# EAGLE board Touch_Shield-Panel-v12a (EAGLE 6.5.0)
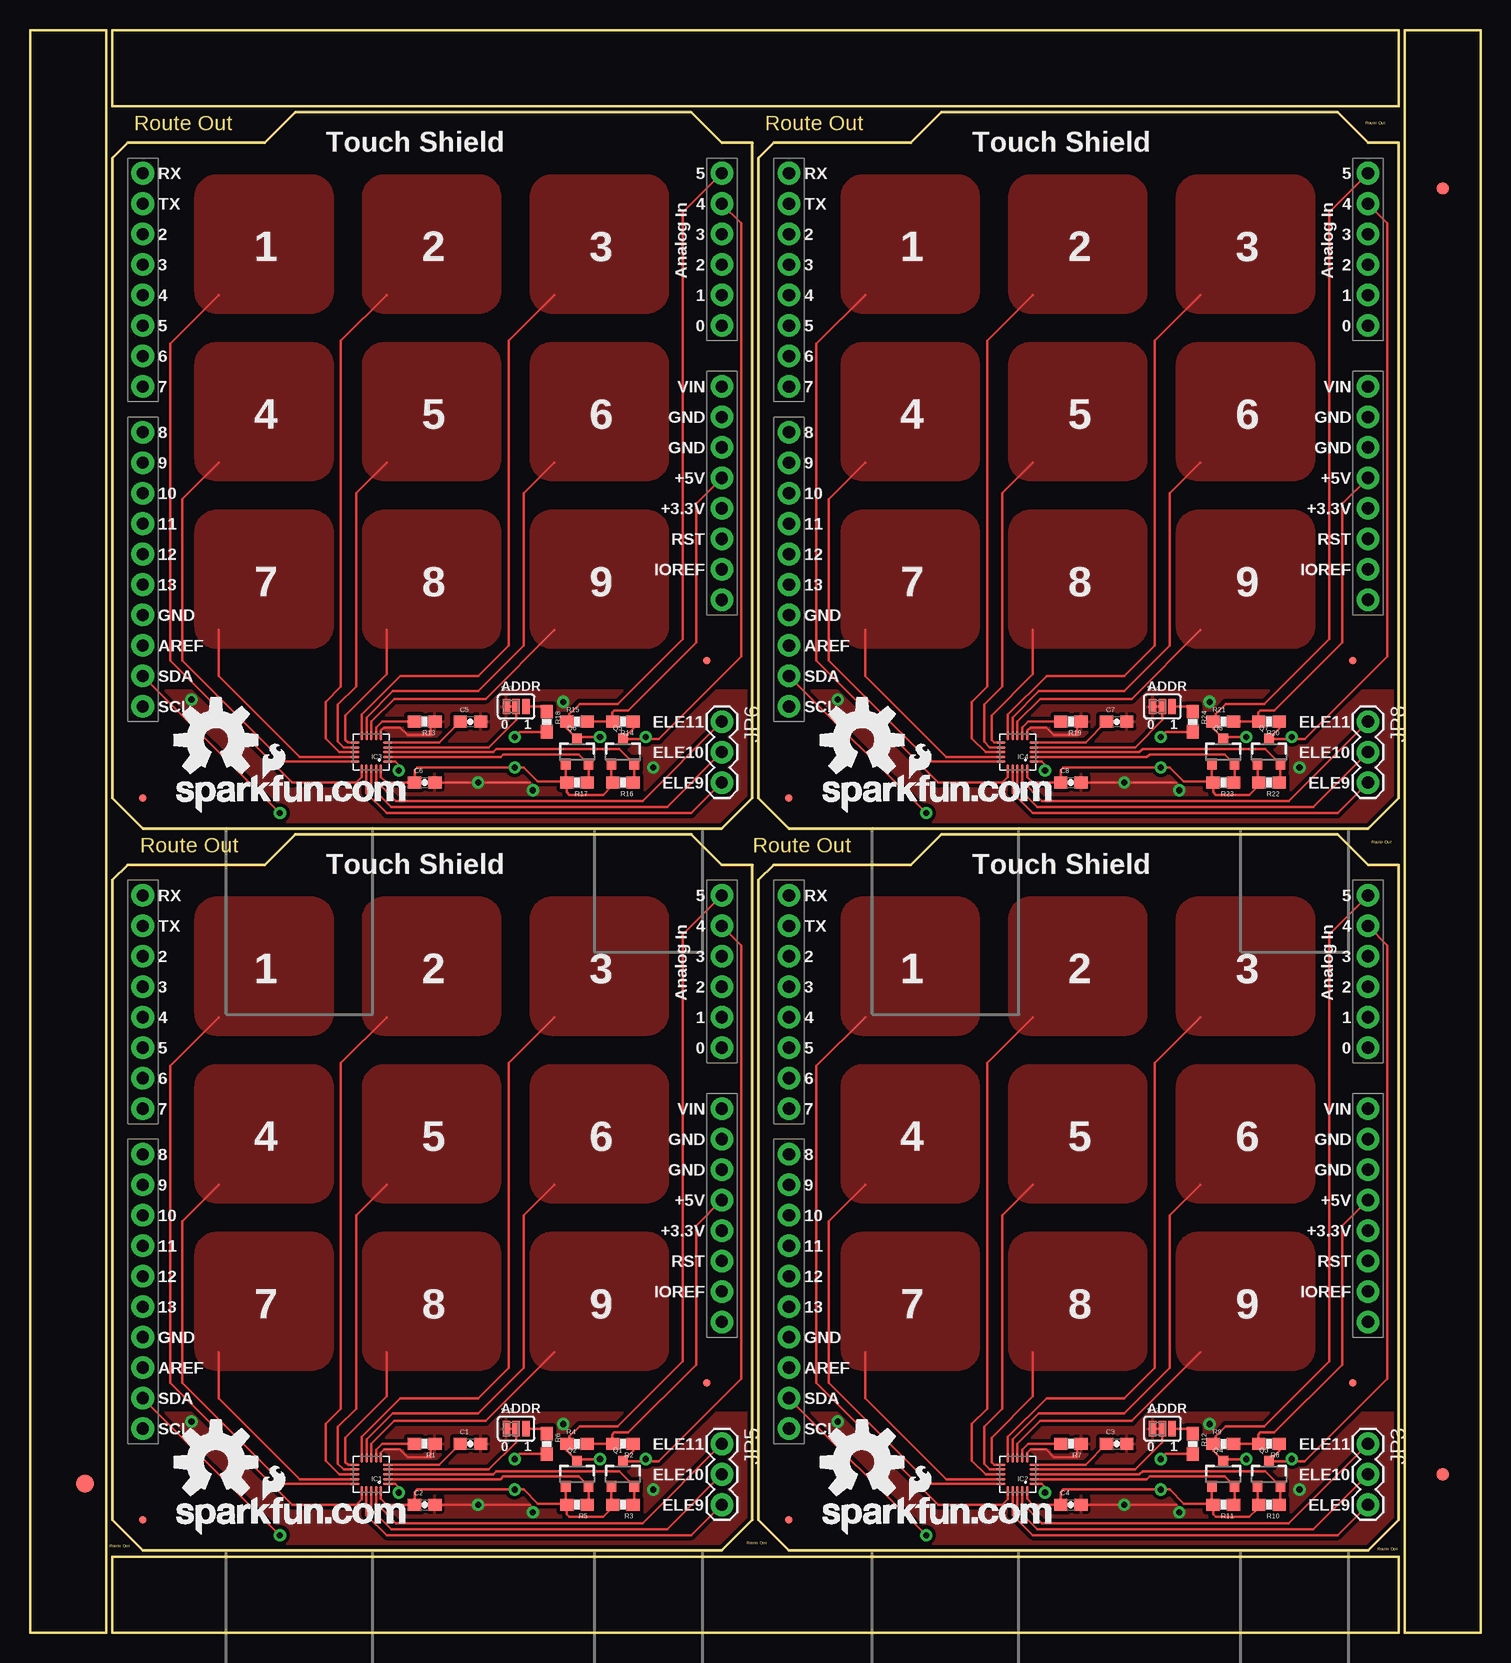
[diagram p0: board, top side]
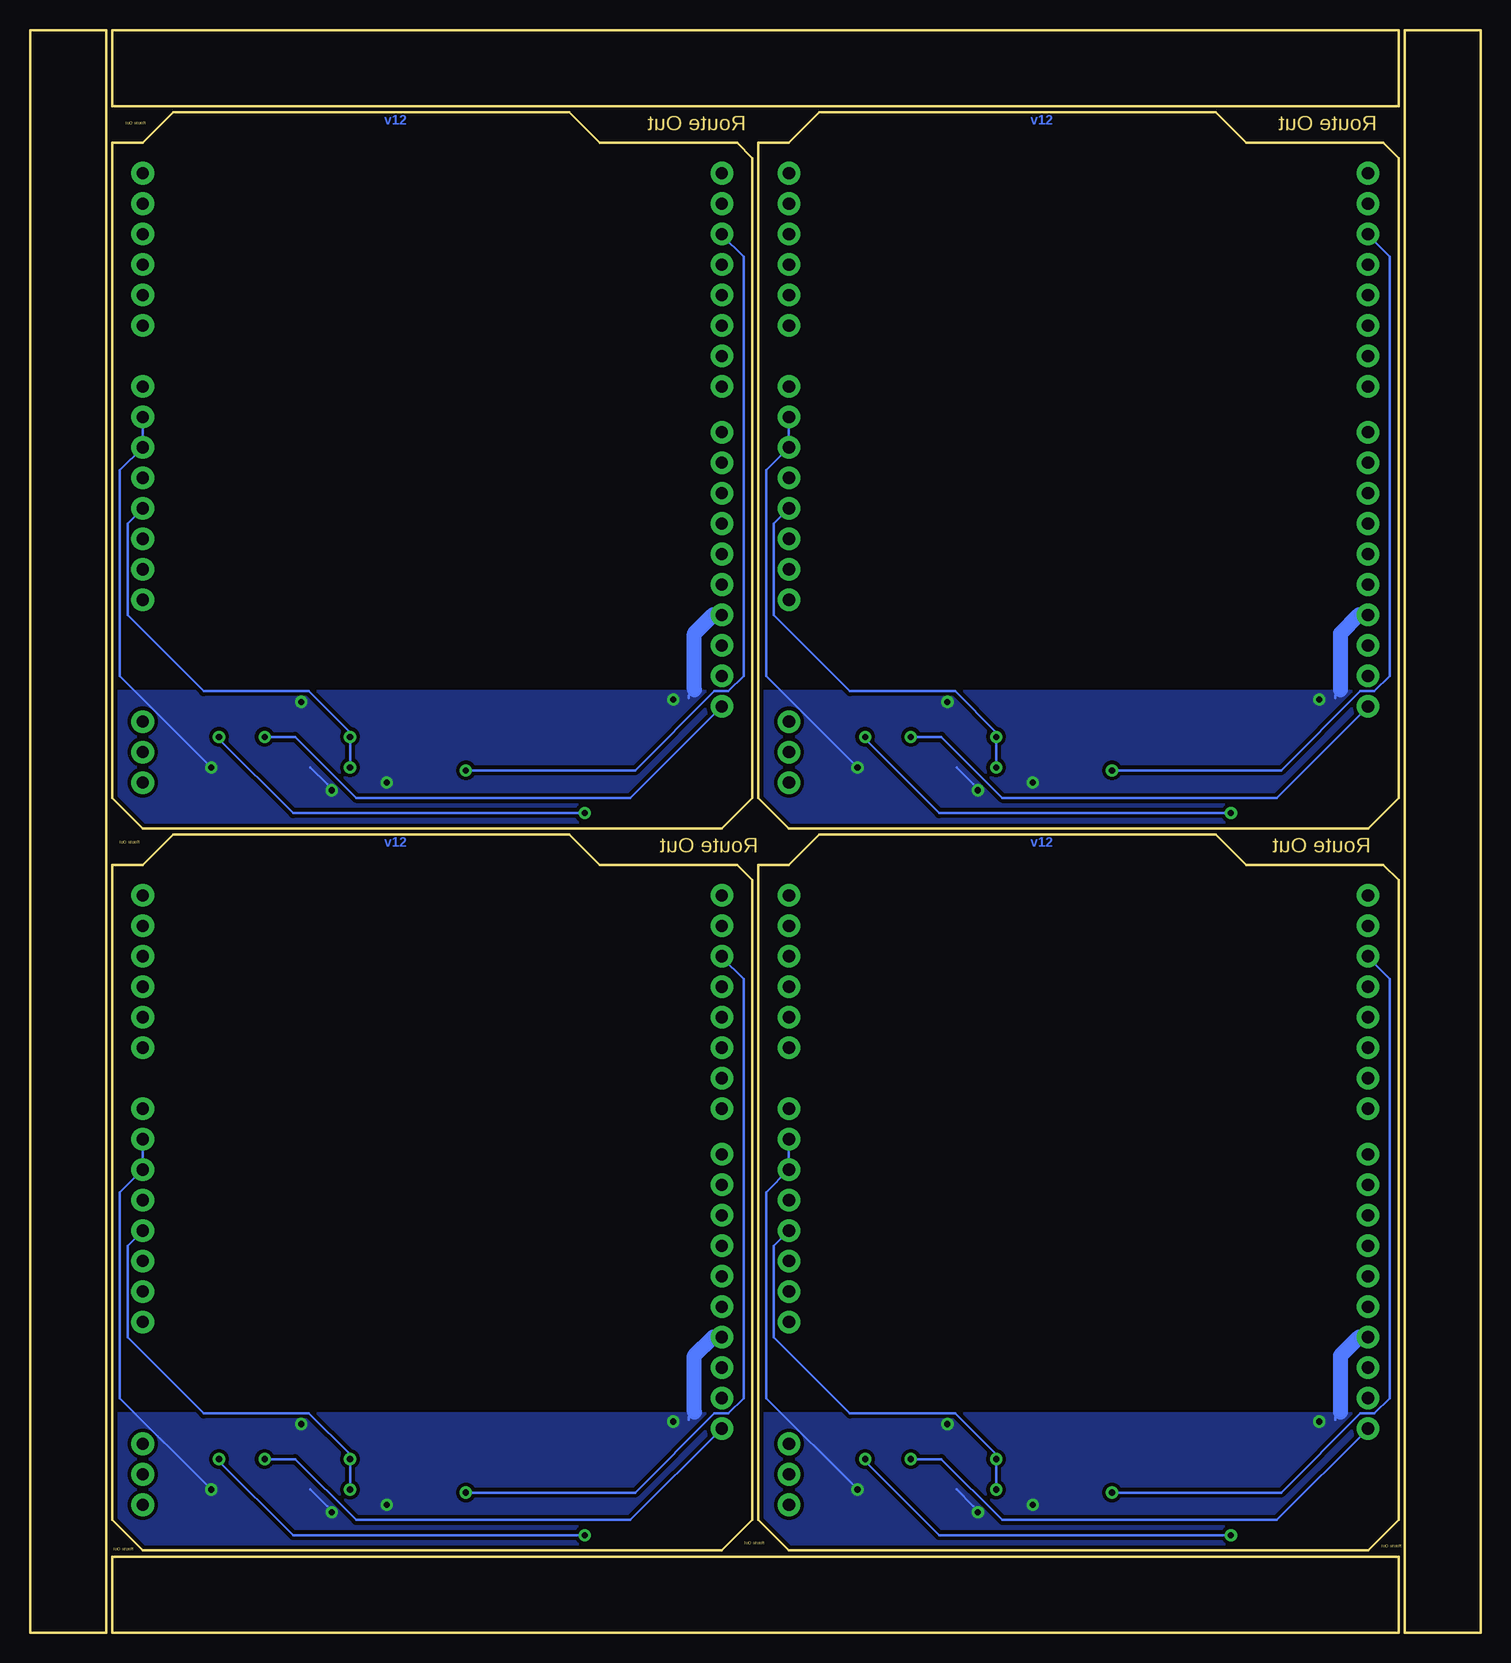
[diagram p1: board, bottom side, seen from below]

Size 120.9 x 133.6 mm. Coordinates in mm from the lower left corner, seen from the top.
Outline: 94.49,127.25 6.86,127.25 6.86,133.6 44.96,133.6
Outline: 36.58,133.6 114.05,133.6 114.05,127.25 86.11,127.25
Outline: 57.66,6.86 9.4,6.86 6.86,9.4 6.86,62.74 8.13,64.01 19.56,64.01 22.1,66.55 55.12,66.55 57.66,64.01 60.2,64.01 60.2,9.4 57.66,6.86
Outline: 111.51,6.86 63.25,6.86 60.71,9.4 60.71,62.74 61.98,64.01 73.41,64.01 75.95,66.55 108.97,66.55 111.51,64.01 114.05,64.01 114.05,9.4 111.51,6.86
Outline: 57.66,67.06 9.4,67.06 6.86,69.6 6.86,122.94 8.13,124.21 19.56,124.21 22.1,126.75 55.12,126.75 57.66,124.21 60.2,124.21 60.2,69.6 57.66,67.06
Outline: 111.51,67.06 63.25,67.06 60.71,69.6 60.71,122.94 61.98,124.21 73.41,124.21 75.95,126.75 108.97,126.75 111.51,124.21 114.05,124.21 114.05,69.6 111.51,67.06
Outline: 6.35,0 6.35,133.6 0,133.6 0,0 6.35,0
Outline: 6.86,0 114.05,0 114.05,6.35 6.86,6.35 6.86,0
Outline: 120.9,0 120.9,133.6 114.55,133.6 114.55,0 120.9,0
Copper layers (1*16): Top 0.035mm / dielectric 1.5mm / Bottom 0.035mm
Design rules "SparkFun *": minimum track width 8mil, minimum drill 20mil, track to track 8mil, track to pad 8mil, pad to pad 8mil, via to via 8mil, smd to smd 8mil, copper to edge 8mil, drill to drill 8mil, minimum pad ring 12mil, minimum via ring 10mil, stop-mask expansion 4mil, vias tented up to drill 20mil, thermal gap 10mil
tRestrict: area 29.5,14.5 to 29.6,14.6; area 83.4,14.5 to 83.4,14.6; area 29.5,74.7 to 29.6,74.8; area 83.4,74.7 to 83.4,74.8

## Footprints (pad centres in the part's own frame; a part is rotated, then mirrored left to right if it is on the bottom)
0603-CAP = smd 1.1 x 1: 1 -0.85,0; 2 0.85,0
FIDUCIAL-1.5X3 = smd 1.5 x 1.5: 1 0,0
FIDUCIAL-1X2 = smd 1 x 1: 1 0,0
MICRO-FIDUCIAL = smd 0.635 x 0.635: 1 0,0
QFN-20-0.4MM-V2 = smd 0.75 x 0.195: 1 -1.367,0.8; 2 -1.367,0.4; 3 -1.367,0; 4 -1.367,-0.4; 5 -1.367,-0.8; 11 1.375,-0.8; 12 1.375,-0.4; 13 1.375,0; 14 1.375,0.4; 15 1.375,0.8 | smd 0.195 x 0.75: 6 -0.795,-1.372; 7 -0.395,-1.372; 8 0.005,-1.372; 9 0.405,-1.372; 10 0.805,-1.372; 16 0.81,1.372; 17 0.41,1.372; 18 0.01,1.372; 19 -0.39,1.372; 20 -0.79,1.372
1X03 = drill 1.016 pad 1.88: 1 0,0; 2 2.54,0; 3 5.08,0
SOT23-3 = smd 0.8 x 0.9: 1 -0.95,-1; 2 0.95,-1; 3 0,1.1
0603-RES = smd 1.1 x 1: 1 -0.85,0; 2 0.85,0
SJ_3_PASTE1&2 = smd 0.635 x 1.27: 1 -0.813,0; 2 0,0; 3 0.813,0
UNO_R3_SHIELD = drill 1.016 pad 1.88: 3.3V 50.8,26.67; 5V 50.8,29.21; A0 50.8,41.91; A1 50.8,44.45; A2 50.8,46.99; A3 50.8,49.53; A4 50.8,52.07; A5 50.8,54.61; AREF 2.54,15.24; D2 2.54,49.53; D3 2.54,46.99; D4 2.54,44.45; D5 2.54,41.91; D6 2.54,39.37; D7 2.54,36.83; D8 2.54,33.02; D9 2.54,30.48; D10 2.54,27.94; D11 2.54,25.4; D12 2.54,22.86; D13 2.54,20.32; GND@0 50.8,31.75; GND@1 50.8,34.29; GND@2 2.54,17.78; IOREF 50.8,21.59; NC 50.8,19.05; RES 50.8,24.13; RX 2.54,54.61; SCL 2.54,10.16; SDA 2.54,12.7; TX 2.54,52.07; VIN 50.8,36.83

## Placement (x,y rotation side)
C1  0.1uF  [0603-CAP]  36.7,15.75 0 top
C2  0.1uF  [0603-CAP]  32.89,10.67 0 top
C3  0.1uF  [0603-CAP]  90.55,15.75 0 top
C4  0.1uF  [0603-CAP]  86.74,10.67 0 top
C5  0.1uF  [0603-CAP]  36.7,75.95 0 top
C6  0.1uF  [0603-CAP]  32.89,70.87 0 top
C7  0.1uF  [0603-CAP]  90.55,75.95 0 top
C8  0.1uF  [0603-CAP]  86.74,70.87 0 top
E$1  [FIDUCIAL-1.5X3]  4.57,12.45 0 top
E$4  [FIDUCIAL-1X2]  117.73,13.21 0 top
E$8  [FIDUCIAL-1X2]  117.73,120.4 180 top
FID1  FIDUCIALUFIDUCIAL  [MICRO-FIDUCIAL]  9.4,9.4 0 top
FID2  FIDUCIALUFIDUCIAL  [MICRO-FIDUCIAL]  56.39,20.83 0 top
FID3  FIDUCIALUFIDUCIAL  [MICRO-FIDUCIAL]  63.25,9.4 0 top
FID4  FIDUCIALUFIDUCIAL  [MICRO-FIDUCIAL]  110.24,20.83 0 top
FID5  FIDUCIALUFIDUCIAL  [MICRO-FIDUCIAL]  9.4,69.6 0 top
FID6  FIDUCIALUFIDUCIAL  [MICRO-FIDUCIAL]  56.39,81.03 0 top
FID7  FIDUCIALUFIDUCIAL  [MICRO-FIDUCIAL]  63.25,69.6 0 top
FID8  FIDUCIALUFIDUCIAL  [MICRO-FIDUCIAL]  110.24,81.03 0 top
IC1  MPR121  [QFN-20-0.4MM-V2]  28.45,13.21 180 top
IC2  MPR121  [QFN-20-0.4MM-V2]  82.3,13.21 180 top
IC3  MPR121  [QFN-20-0.4MM-V2]  28.45,73.41 180 top
IC4  MPR121  [QFN-20-0.4MM-V2]  82.3,73.41 180 top
JP1  LOGO-SFENEW  [SFE-NEW-WEBLOGO]  12.19,8.18 0 top
JP2  LOGO-SFENEW  [SFE-NEW-WEBLOGO]  66.04,8.18 0 top
JP3  extra  [1X03]  111.51,15.75 270 top
JP4  LOGO-SFENEW  [SFE-NEW-WEBLOGO]  12.19,68.38 0 top
JP5  extra  [1X03]  57.66,15.75 270 top
JP6  extra  [1X03]  57.66,75.95 270 top
JP7  LOGO-SFENEW  [SFE-NEW-WEBLOGO]  66.04,68.38 0 top
JP8  extra  [1X03]  111.51,75.95 270 top
Q1  BSS138  [SOT23-3]  49.4,13.21 0 top
Q2  BSS138  [SOT23-3]  45.59,13.21 0 top
Q3  BSS138  [SOT23-3]  103.25,13.21 0 top
Q4  BSS138  [SOT23-3]  99.44,13.21 0 top
Q5  BSS138  [SOT23-3]  49.4,73.41 0 top
Q6  BSS138  [SOT23-3]  45.59,73.41 0 top
Q7  BSS138  [SOT23-3]  103.25,73.41 0 top
Q8  BSS138  [SOT23-3]  99.44,73.41 0 top
R1  75k  [0603-RES]  32.89,15.75 180 top
R2  10k  [0603-RES]  49.4,15.75 180 top
R3  10k  [0603-RES]  49.4,10.67 180 top
R4  10k  [0603-RES]  45.59,15.75 0 top
R5  10k  [0603-RES]  45.59,10.67 180 top
R6  10K  [0603-RES]  43.05,15.75 270 top
R7  75k  [0603-RES]  86.74,15.75 180 top
R8  10k  [0603-RES]  103.25,15.75 180 top
R9  10k  [0603-RES]  99.44,15.75 0 top
R10  10k  [0603-RES]  103.25,10.67 180 top
R11  10k  [0603-RES]  99.44,10.67 180 top
R12  10K  [0603-RES]  96.9,15.75 270 top
R13  75k  [0603-RES]  32.89,75.95 180 top
R14  10k  [0603-RES]  49.4,75.95 180 top
R15  10k  [0603-RES]  45.59,75.95 0 top
R16  10k  [0603-RES]  49.4,70.87 180 top
R17  10k  [0603-RES]  45.59,70.87 180 top
R18  10K  [0603-RES]  43.05,75.95 270 top
R19  75k  [0603-RES]  86.74,75.95 180 top
R20  10k  [0603-RES]  103.25,75.95 180 top
R21  10k  [0603-RES]  99.44,75.95 0 top
R22  10k  [0603-RES]  103.25,70.87 180 top
R23  10k  [0603-RES]  99.44,70.87 180 top
R24  10K  [0603-RES]  96.9,75.95 270 top
SJ1  [SJ_3_PASTE1&2]  40.51,17.02 0 top
SJ2  [SJ_3_PASTE1&2]  94.36,17.02 0 top
SJ3  [SJ_3_PASTE1&2]  40.51,77.22 0 top
SJ4  [SJ_3_PASTE1&2]  94.36,77.22 0 top
U1  ARDUINO_R3_SHIELD  [UNO_R3_SHIELD]  6.86,6.86 0 top
U2  ARDUINO_R3_SHIELD  [UNO_R3_SHIELD]  60.71,6.86 0 top
U3  ARDUINO_R3_SHIELD  [UNO_R3_SHIELD]  6.86,67.06 0 top
U4  ARDUINO_R3_SHIELD  [UNO_R3_SHIELD]  60.71,67.06 0 top
U$1  OSHW-LOGOL  [OSHW-LOGO-L]  69.34,14.22 0 top
U$2  OSHW-LOGOL  [OSHW-LOGO-L]  15.49,74.42 0 top
U$3  OSHW-LOGOL  [OSHW-LOGO-L]  69.34,74.42 0 top
U$5  OSHW-LOGOL  [OSHW-LOGO-L]  15.49,14.22 0 top

## Library data of the parts
C1-C8 JP1-JP8 Q1-Q8 R1 R7 R13 R19 = SparkFun
E$1 E$4 E$8 FID1-FID8 U$1-U$3 U$5 = SparkFun-Aesthetics
IC1-IC4 = SparkFun-Sensors
R2-R6 R8-R12 R14-R18 R20-R24 = SparkFun-Resistors; PROD_ID: RES-00824
SJ1-SJ4 = SparkFun-Passives
U1-U4 = SparkFun-Boards

## Nets
3.3V: C2.1 IC1.20 Q1.1 Q2.1 R3.2 R5.2 R6.2 U1.3.3V
3.3V1: C4.1 IC2.20 Q3.1 Q4.1 R10.2 R11.2 R12.2 U2.3.3V
3.3V2: C6.1 IC3.20 Q5.1 Q6.1 R16.2 R17.2 R18.2 U3.3.3V
3.3V3: C8.1 IC4.20 Q7.1 Q8.1 R22.2 R23.2 R24.2 U4.3.3V
5V: R2.2 R4.2 U1.5V
5V1: R8.2 R9.2 U2.5V
5V2: R14.2 R15.2 U3.5V
5V3: R20.2 R21.2 U4.5V
*IRQ: IC1.1 U1.D2
*IRQ1: IC2.1 U2.D2
*IRQ2: IC3.1 U3.D2
*IRQ3: IC4.1 U4.D2
A0: U1.A0
A1: U1.A1
A2: U1.A2
A3: U1.A3
A4: U2.A0
A5: U2.A1
A6: U2.A2
A7: U2.A3
A8: U3.A0
A9: U3.A1
A10: U3.A2
A11: U3.A3
A12: U4.A0
A13: U4.A1
A14: U4.A2
A15: U4.A3
AREF: U1.AREF
AREF1: U2.AREF
AREF2: U3.AREF
AREF3: U4.AREF
D1: U2.D3
D2: U2.D4
D3: U1.D3
D4: U1.D4
D5: U1.D5
D6: U1.D6
D7: U1.D7
D8: U1.D8
D9: U1.D9
D10: U1.D10
D11: U1.D11
D12: U1.D12
D13: U1.D13
D14: U2.D5
D15: U2.D6
D16: U2.D7
D17: U2.D8
D18: U2.D9
D19: U2.D10
D20: U2.D11
D21: U2.D12
D22: U2.D13
D23: U3.D3
D24: U3.D4
D25: U3.D5
D26: U3.D6
D27: U3.D7
D28: U3.D8
D29: U3.D9
D30: U3.D10
D31: U3.D11
D32: U3.D12
D33: U3.D13
D34: U4.D3
D35: U4.D4
D36: U4.D5
D37: U4.D6
D38: U4.D7
D39: U4.D8
D40: U4.D9
D41: U4.D10
D42: U4.D11
D43: U4.D12
D44: U4.D13
ELE1: IC2.19 JP3.1
ELE2: IC2.18 JP3.2
ELE3: IC2.17 JP3.3
ELE4: IC3.19 JP6.1
ELE5: IC3.18 JP6.2
ELE6: IC3.17 JP6.3
ELE7: IC4.19 JP8.1
ELE8: IC4.18 JP8.2
ELE9: IC1.17 JP5.3
ELE10: IC1.18 JP5.2
ELE11: IC1.19 JP5.1
ELE12: IC4.17 JP8.3
GND: C1.2 C2.2 IC1.6 R1.1 SJ1.1 U1.GND@0 U1.GND@1 U1.GND@2
GND1: C3.2 C4.2 IC2.6 R7.1 SJ2.1 U2.GND@0 U2.GND@1 U2.GND@2
GND2: C5.2 C6.2 IC3.6 R13.1 SJ3.1 U3.GND@0 U3.GND@1 U3.GND@2
GND3: C7.2 C8.2 IC4.6 R19.1 SJ4.1 U4.GND@0 U4.GND@1 U4.GND@2
IOREF: U1.IOREF
IOREF1: U2.IOREF
IOREF2: U3.IOREF
IOREF3: U4.IOREF
N$1: IC1.4 SJ1.2
N$2: R6.1 SJ1.3
N$3: IC2.4 SJ2.2
N$4: R12.1 SJ2.3
N$5: IC3.4 SJ3.2
N$6: R18.1 SJ3.3
N$7: IC4.4 SJ4.2
N$8: R24.1 SJ4.3
PAD1: IC1.16
PAD2: IC1.13
PAD3: IC1.10
PAD4: IC1.15
PAD5: IC1.12
PAD6: IC1.9
PAD7: IC1.14
PAD8: IC1.11
PAD9: IC1.8
PAD10: IC2.16
PAD11: IC2.15
PAD12: IC2.11
PAD13: IC2.14
PAD14: IC2.13
PAD15: IC2.12
PAD16: IC2.8
PAD17: IC2.9
PAD18: IC2.10
PAD19: IC3.16
PAD20: IC3.15
PAD21: IC3.11
PAD22: IC3.14
PAD23: IC3.13
PAD24: IC3.12
PAD25: IC3.8
PAD26: IC3.9
PAD27: IC3.10
PAD28: IC4.16
PAD29: IC4.15
PAD30: IC4.11
PAD31: IC4.14
PAD32: IC4.13
PAD33: IC4.12
PAD34: IC4.8
PAD35: IC4.9
PAD36: IC4.10
RESET: U1.RES
RESET1: U2.RES
RESET2: U3.RES
RESET3: U4.RES
REXT: IC1.7 R1.2
REXT1: IC2.7 R7.2
REXT2: IC3.7 R13.2
REXT3: IC4.7 R19.2
RX: U1.RX
RX1: U2.RX
RX2: U3.RX
RX3: U4.RX
SCL_H: Q2.3 R4.1 U1.A5 U1.SCL
SCL_H1: Q4.3 R9.1 U2.A5 U2.SCL
SCL_H2: Q6.3 R15.1 U3.A5 U3.SCL
SCL_H3: Q8.3 R21.1 U4.A5 U4.SCL
SCL_L: IC1.2 Q2.2 R5.1
SCL_L1: IC2.2 Q4.2 R11.1
SCL_L2: IC3.2 Q6.2 R17.1
SCL_L3: IC4.2 Q8.2 R23.1
SDA_H: Q1.3 R2.1 U1.A4 U1.SDA
SDA_H1: Q3.3 R8.1 U2.A4 U2.SDA
SDA_H2: Q5.3 R14.1 U3.A4 U3.SDA
SDA_H3: Q7.3 R20.1 U4.A4 U4.SDA
SDA_L: IC1.3 Q1.2 R3.1
SDA_L1: IC2.3 Q3.2 R10.1
SDA_L2: IC3.3 Q5.2 R16.1
SDA_L3: IC4.3 Q7.2 R22.1
TX: U1.TX
TX1: U2.TX
TX2: U3.TX
TX3: U4.TX
VIN: U1.VIN
VIN1: U2.VIN
VIN2: U3.VIN
VIN3: U4.VIN
VREG: C1.1 IC1.5
VREG1: C3.1 IC2.5
VREG2: C5.1 IC3.5
VREG3: C7.1 IC4.5

## Tracks (layer width: path | path; a pad name or v marks a point on that pad's centre or on a via)
3.3V  (via drill 0.51)
  Top 0.203: 44.96,10.67 R5.2 | Q2.1 44.64,10.77 | 44.64,10.77 R5.2 | Q1.1 48.45,10.77 | 48.45,10.77 R3.2 | IC1.20 29.24,11.15 29.72,10.67 C2.1 32.04,11.72 32.26,11.94 v40.39,11.94 41.15,11.94 42.32,10.77 44.64,10.77 | R6.2 40.81,14.9 v40.39,14.48 | 48.45,10.77 48.45,10.35 47.75,9.65 44.96,9.65 44.74,9.87 R5.2
  Bottom 0.203: U1.3.3V 58.93,32.26 58.93,24.64 52.58,18.29 43.81,18.29 40.39,14.86 v40.39,14.48 v40.39,11.94
3.3V1  (via drill 0.51)
  Top 0.203: 98.81,10.67 R11.2 | Q4.1 98.49,10.77 | 98.49,10.77 R11.2 | Q3.1 102.3,10.77 | 102.3,10.77 R10.2 | IC2.20 83.09,11.15 83.57,10.67 C4.1 85.89,11.72 86.11,11.94 v94.23,11.94 95,11.94 96.17,10.77 98.49,10.77 | R12.2 94.65,14.9 v94.23,14.48 | 102.3,10.77 102.3,10.35 101.6,9.65 98.81,9.65 98.59,9.87 R11.2
  Bottom 0.203: U2.3.3V 112.78,32.26 112.78,24.64 106.43,18.29 97.66,18.29 94.23,14.86 v94.23,14.48 v94.23,11.94
3.3V2  (via drill 0.51)
  Top 0.203: 44.96,70.87 R17.2 | Q6.1 44.64,70.97 | 44.64,70.97 R17.2 | Q5.1 48.45,70.97 | 48.45,70.97 R16.2 | IC3.20 29.24,71.35 29.72,70.87 C6.1 32.04,71.92 32.26,72.14 v40.39,72.14 41.15,72.14 42.32,70.97 44.64,70.97 | R18.2 40.81,75.1 v40.39,74.68 | 48.45,70.97 48.45,70.55 47.75,69.85 44.96,69.85 44.74,70.06 R17.2
  Bottom 0.203: U3.3.3V 58.93,92.46 58.93,84.84 52.58,78.49 43.81,78.49 40.39,75.06 v40.39,74.68 v40.39,72.14
3.3V3  (via drill 0.51)
  Top 0.203: 98.81,70.87 R23.2 | Q8.1 98.49,70.97 | 98.49,70.97 R23.2 | Q7.1 102.3,70.97 | 102.3,70.97 R22.2 | IC4.20 83.09,71.35 83.57,70.87 C8.1 85.89,71.92 86.11,72.14 v94.23,72.14 95,72.14 96.17,70.97 98.49,70.97 | R24.2 94.65,75.1 v94.23,74.68 | 102.3,70.97 102.3,70.55 101.6,69.85 98.81,69.85 98.59,70.06 R23.2
  Bottom 0.203: U4.3.3V 112.78,92.46 112.78,84.84 106.43,78.49 97.66,78.49 94.23,75.06 v94.23,74.68 v94.23,72.14
5V
  Top 0.203: R4.2 R2.2 48.51,15.79 48.51,16.51 48.69,16.69 49.86,16.69 55.52,22.35 55.52,33.93 U1.5V
5V1
  Top 0.203: R9.2 R8.2 102.36,15.79 102.36,16.51 102.54,16.69 103.71,16.69 109.37,22.35 109.37,33.93 U2.5V
5V2
  Top 0.203: R15.2 R14.2 48.51,75.98 48.51,76.71 48.69,76.89 49.86,76.89 55.52,82.55 55.52,94.13 U3.5V
5V3
  Top 0.203: R21.2 R20.2 102.36,75.98 102.36,76.71 102.54,76.89 103.71,76.89 109.37,82.55 109.37,94.13 U4.5V
*IRQ  (via drill 0.51)
  Top 0.203: IC1.1 30.45,12.41 30.82,12.04 30.82,11.77 v30.73,11.68
  Bottom 0.203: U1.D2 9.4,56.31 7.59,54.51 7.59,19.56 8.87,18.29 10.03,18.29 16.64,11.68 v30.73,11.68
*IRQ1  (via drill 0.51)
  Top 0.203: IC2.1 84.3,12.41 84.67,12.04 84.67,11.77 v84.58,11.68
  Bottom 0.203: U2.D2 63.25,56.31 61.44,54.51 61.44,19.56 62.71,18.29 63.88,18.29 70.48,11.68 v84.58,11.68
*IRQ2  (via drill 0.51)
  Top 0.203: IC3.1 30.45,72.61 30.82,72.24 30.82,71.97 v30.73,71.88
  Bottom 0.203: U3.D2 9.4,116.51 7.59,114.71 7.59,79.76 8.87,78.49 10.03,78.49 16.64,71.88 v30.73,71.88
*IRQ3  (via drill 0.51)
  Top 0.203: IC4.1 84.3,72.61 84.67,72.24 84.67,71.97 v84.58,71.88
  Bottom 0.203: U4.D2 63.25,116.51 61.44,114.71 61.44,79.76 62.71,78.49 63.88,78.49 70.48,71.88 v84.58,71.88
ELE1
  Top 0.203: JP3.1 104.9,9.14 84.33,9.14 82.69,10.79 IC2.19
ELE2
  Top 0.203: JP3.2 106.93,8.64 83.95,8.64 82.29,10.3 IC2.18
ELE3
  Top 0.203: JP3.3 108.97,8.13 83.57,8.13 81.89,9.81 IC2.17
ELE4
  Top 0.203: JP6.1 51.05,69.34 30.48,69.34 28.84,70.98 IC3.19
ELE5
  Top 0.203: JP6.2 53.09,68.83 30.1,68.83 28.44,70.5 IC3.18
ELE6
  Top 0.203: JP6.3 55.12,68.33 29.72,68.33 28.04,70.01 IC3.17
ELE7
  Top 0.203: JP8.1 104.9,69.34 84.33,69.34 82.69,70.98 IC4.19
ELE8
  Top 0.203: JP8.2 106.93,68.83 83.95,68.83 82.29,70.5 IC4.18
ELE9
  Top 0.203: JP5.3 55.12,8.13 29.72,8.13 28.04,9.81 IC1.17
ELE10
  Top 0.203: JP5.2 53.09,8.64 30.1,8.64 28.44,10.3 IC1.18
ELE11
  Top 0.203: JP5.1 51.05,9.14 30.48,9.14 28.84,10.79 IC1.19
ELE12
  Top 0.203: JP8.3 108.97,68.33 83.57,68.33 81.89,70.01 IC4.17
GND  (via drill 0.51)
  Top 0.203: IC1.6 29.24,14.99 29.53,15.28 30.82,15.28 31.47,14.63 33.41,14.63 33.41,15.42 R1.1 | C2.2 41.66,10.67 | SJ1.1 40.51,17.02
  Bottom 0.203: 12.15,17.73 12.15,17.95 11.68,18.41 | 42.29,10.54 43.69,11.94 | U1.GND@1 U1.GND@0 59.56,36.7 59.56,19.56 v51.94,11.94
  Bottom 1.27: U1.GND@2 10.16,24.64 11.68,23.11 11.68,18.41
  other vias: 13.46,17.6 37.34,10.67 44.45,17.4 41.91,10.03
  pour Bottom (isolate 0.305): 6.86,6.86 60.2,6.86 60.2,18.29 6.86,18.29
  pour Top (isolate 0.305): 6.86,18.29 6.86,6.86 60.2,6.86 60.2,18.29
GND1  (via drill 0.51)
  Top 0.203: IC2.6 83.09,14.99 83.38,15.28 84.67,15.28 85.32,14.63 87.26,14.63 87.26,15.42 R7.1 | C4.2 95.5,10.67 | SJ2.1 94.36,17.02
  Bottom 0.203: 66,17.73 66,17.95 65.53,18.41 | 96.14,10.54 97.54,11.94 | U2.GND@1 U2.GND@0 113.41,36.7 113.41,19.56 v105.79,11.94
  Bottom 1.27: U2.GND@2 64.01,24.64 65.53,23.11 65.53,18.41
  other vias: 67.31,17.6 91.19,10.67 98.3,17.4 95.76,10.03
  pour Bottom (isolate 0.305): 60.71,6.86 114.05,6.86 114.05,18.29 60.71,18.29
  pour Top (isolate 0.305): 60.71,18.29 60.71,6.86 114.05,6.86 114.05,18.29
GND2  (via drill 0.51)
  Top 0.203: IC3.6 29.24,75.19 29.53,75.48 30.82,75.48 31.47,74.83 33.41,74.83 33.41,75.62 R13.1 | C6.2 41.66,70.87 | SJ3.1 40.51,77.22
  Bottom 0.203: 12.15,77.93 12.15,78.14 11.68,78.61 | 42.29,70.74 43.69,72.14 | U3.GND@1 U3.GND@0 59.56,96.9 59.56,79.76 v51.94,72.14
  Bottom 1.27: U3.GND@2 10.16,84.84 11.68,83.31 11.68,78.61
  other vias: 13.46,77.8 37.34,70.87 44.45,77.6 41.91,70.23
  pour Bottom (isolate 0.305): 6.86,67.06 60.2,67.06 60.2,78.49 6.86,78.49
  pour Top (isolate 0.305): 6.86,78.49 6.86,67.06 60.2,67.06 60.2,78.49
GND3  (via drill 0.51)
  Top 0.203: IC4.6 83.09,75.19 83.38,75.48 84.67,75.48 85.32,74.83 87.26,74.83 87.26,75.62 R19.1 | C8.2 95.5,70.87 | SJ4.1 94.36,77.22
  Bottom 0.203: 66,77.93 66,78.14 65.53,78.61 | 96.14,70.74 97.54,72.14 | U4.GND@1 U4.GND@0 113.41,96.9 113.41,79.76 v105.79,72.14
  Bottom 1.27: U4.GND@2 64.01,84.84 65.53,83.31 65.53,78.61
  other vias: 67.31,77.8 91.19,70.87 98.3,77.6 95.76,70.23
  pour Bottom (isolate 0.305): 60.71,67.06 114.05,67.06 114.05,78.49 60.71,78.49
  pour Top (isolate 0.305): 60.71,78.49 60.71,67.06 114.05,67.06 114.05,78.49
N$1
  Top 0.203: IC1.4 38.25,13.61 40.51,15.88 SJ1.2
N$2
  Top 0.203: SJ1.3 42.63,17.02 R6.1
N$3
  Top 0.203: IC2.4 92.09,13.61 94.36,15.88 SJ2.2
N$4
  Top 0.203: SJ2.3 96.48,17.02 R12.1
N$5
  Top 0.203: IC3.4 38.25,73.81 40.51,76.07 SJ3.2
N$6
  Top 0.203: SJ3.3 42.63,77.22 R18.1
N$7
  Top 0.203: IC4.4 92.09,73.81 94.36,76.07 SJ4.2
N$8
  Top 0.203: SJ4.3 96.48,77.22 R24.1
PAD1
  Top 0.203: 15.75,51.31 11.68,47.24 11.68,20.83 21.84,10.67 27.18,10.67 27.64,11.13 IC1.16
  pour Top (isolate 0.305): 13.79,51.65 arc90 15.59,49.85 23.43,49.85 arc90 25.22,51.65 25.22,59.48 arc90 23.43,61.28 15.59,61.28 arc90 13.79,59.48
PAD2
  Top 0.203: 29.72,51.31 25.91,47.5 25.91,18.67 24.64,17.4 24.64,14.35 25.78,13.21 IC1.13
  pour Top (isolate 0.305): 27.76,51.65 arc90 29.56,49.85 37.4,49.85 arc90 39.19,51.65 39.19,59.48 arc90 37.4,61.28 29.56,61.28 arc90 27.76,59.48
PAD3
  Top 0.203: 43.69,51.31 39.88,47.5 39.88,22.1 37.34,19.56 30.86,19.56 27.64,16.34 IC1.10
  pour Top (isolate 0.305): 41.73,51.65 arc90 43.53,49.85 51.37,49.85 arc90 53.16,51.65 53.16,59.48 arc90 51.37,61.28 43.53,61.28 arc90 41.73,59.48
PAD4
  Top 0.203: 15.75,37.34 12.7,34.29 12.7,20.83 21.12,12.41 IC1.15
  pour Top (isolate 0.305): 13.79,37.68 arc90 15.59,35.88 23.43,35.88 arc90 25.22,37.68 25.22,45.51 arc90 23.43,47.31 15.59,47.31 arc90 13.79,45.51
PAD5
  Top 0.203: 29.72,37.34 27.18,34.8 27.18,18.68 25.65,17.16 25.65,14.1 26.14,13.61 IC1.12
  pour Top (isolate 0.305): 27.76,37.68 arc90 29.56,35.88 37.4,35.88 arc90 39.19,37.68 39.19,45.51 arc90 37.4,47.31 29.56,47.31 arc90 27.76,45.51
PAD6
  Top 0.203: 43.69,37.34 41.15,34.8 41.15,22.1 37.34,18.29 30.23,18.29 28.04,16.11 IC1.9
  pour Top (isolate 0.305): 41.73,37.68 arc90 43.53,35.88 51.37,35.88 arc90 53.16,37.68 53.16,45.51 arc90 51.37,47.31 43.53,47.31 arc90 41.73,45.51
PAD7
  Top 0.203: IC1.14 22.5,12.81 15.75,19.56 15.75,23.37
  pour Top (isolate 0.305): 13.79,23.71 arc90 15.59,21.91 23.43,21.91 arc90 25.22,23.71 25.22,31.54 arc90 23.43,33.34 15.59,33.34 arc90 13.79,31.54
PAD8
  Top 0.203: 29.72,23.37 29.72,19.7 26.29,16.27 26.29,14.22 26.5,14.01 IC1.11
  pour Top (isolate 0.305): 27.76,23.71 arc90 29.56,21.91 37.4,21.91 arc90 39.19,23.71 39.19,31.54 arc90 37.4,33.34 29.56,33.34 arc90 27.76,31.54
PAD9
  Top 0.203: IC1.8 28.44,15.74 30.35,17.65 37.97,17.65 43.69,23.37
  pour Top (isolate 0.305): 41.73,23.71 arc90 43.53,21.91 51.37,21.91 arc90 53.16,23.71 53.16,31.54 arc90 51.37,33.34 43.53,33.34 arc90 41.73,31.54
PAD10
  Top 0.203: 69.6,51.31 65.53,47.24 65.53,20.83 75.69,10.67 81.03,10.67 81.49,11.13 IC2.16
  pour Top (isolate 0.305): 67.64,51.65 arc90 69.44,49.85 77.27,49.85 arc90 79.07,51.65 79.07,59.48 arc90 77.27,61.28 69.44,61.28 arc90 67.64,59.48
PAD11
  Top 0.203: 69.6,37.34 66.55,34.29 66.55,20.83 74.97,12.41 IC2.15
  pour Top (isolate 0.305): 67.64,37.68 arc90 69.44,35.88 77.27,35.88 arc90 79.07,37.68 79.07,45.51 arc90 77.27,47.31 69.44,47.31 arc90 67.64,45.51
PAD12
  Top 0.203: 83.57,23.37 83.57,19.7 80.14,16.27 80.14,14.22 80.35,14.01 IC2.11
  pour Top (isolate 0.305): 81.61,23.71 arc90 83.41,21.91 91.24,21.91 arc90 93.04,23.71 93.04,31.54 arc90 91.24,33.34 83.41,33.34 arc90 81.61,31.54
PAD13
  Top 0.203: IC2.14 76.35,12.81 69.6,19.56 69.6,23.37
  pour Top (isolate 0.305): 67.64,23.71 arc90 69.44,21.91 77.27,21.91 arc90 79.07,23.71 79.07,31.54 arc90 77.27,33.34 69.44,33.34 arc90 67.64,31.54
PAD14
  Top 0.203: 83.57,51.31 79.76,47.5 79.76,18.67 78.49,17.4 78.49,14.35 79.63,13.21 IC2.13
  pour Top (isolate 0.305): 81.61,51.65 arc90 83.41,49.85 91.24,49.85 arc90 93.04,51.65 93.04,59.48 arc90 91.24,61.28 83.41,61.28 arc90 81.61,59.48
PAD15
  Top 0.203: 83.57,37.34 81.03,34.8 81.03,18.68 79.5,17.16 79.5,14.1 79.99,13.61 IC2.12
  pour Top (isolate 0.305): 81.61,37.68 arc90 83.41,35.88 91.24,35.88 arc90 93.04,37.68 93.04,45.51 arc90 91.24,47.31 83.41,47.31 arc90 81.61,45.51
PAD16
  Top 0.203: IC2.8 82.29,15.74 84.2,17.65 91.82,17.65 97.54,23.37
  pour Top (isolate 0.305): 95.58,23.71 arc90 97.38,21.91 105.21,21.91 arc90 107.01,23.71 107.01,31.54 arc90 105.21,33.34 97.38,33.34 arc90 95.58,31.54
PAD17
  Top 0.203: 97.54,37.34 95,34.8 95,22.1 91.19,18.29 84.07,18.29 81.89,16.11 IC2.9
  pour Top (isolate 0.305): 95.58,37.68 arc90 97.38,35.88 105.21,35.88 arc90 107.01,37.68 107.01,45.51 arc90 105.21,47.31 97.38,47.31 arc90 95.58,45.51
PAD18
  Top 0.203: 97.54,51.31 93.73,47.5 93.73,22.1 91.19,19.56 84.71,19.56 81.49,16.34 IC2.10
  pour Top (isolate 0.305): 95.58,51.65 arc90 97.38,49.85 105.21,49.85 arc90 107.01,51.65 107.01,59.48 arc90 105.21,61.28 97.38,61.28 arc90 95.58,59.48
PAD19
  Top 0.203: 15.75,111.51 11.68,107.44 11.68,81.03 21.84,70.87 27.18,70.87 27.64,71.33 IC3.16
  pour Top (isolate 0.305): 13.79,111.84 arc90 15.59,110.05 23.43,110.05 arc90 25.22,111.84 25.22,119.68 arc90 23.43,121.48 15.59,121.48 arc90 13.79,119.68
PAD20
  Top 0.203: 15.75,97.54 12.7,94.49 12.7,81.03 21.12,72.61 IC3.15
  pour Top (isolate 0.305): 13.79,97.87 arc90 15.59,96.08 23.43,96.08 arc90 25.22,97.87 25.22,105.71 arc90 23.43,107.51 15.59,107.51 arc90 13.79,105.71
PAD21
  Top 0.203: 29.72,83.57 29.72,79.9 26.29,76.47 26.29,74.42 26.5,74.21 IC3.11
  pour Top (isolate 0.305): 27.76,83.9 arc90 29.56,82.11 37.4,82.11 arc90 39.19,83.9 39.19,91.74 arc90 37.4,93.54 29.56,93.54 arc90 27.76,91.74
PAD22
  Top 0.203: IC3.14 22.5,73.01 15.75,79.76 15.75,83.57
  pour Top (isolate 0.305): 13.79,83.9 arc90 15.59,82.11 23.43,82.11 arc90 25.22,83.9 25.22,91.74 arc90 23.43,93.54 15.59,93.54 arc90 13.79,91.74
PAD23
  Top 0.203: 29.72,111.51 25.91,107.7 25.91,78.87 24.64,77.6 24.64,74.55 25.78,73.41 IC3.13
  pour Top (isolate 0.305): 27.76,111.84 arc90 29.56,110.05 37.4,110.05 arc90 39.19,111.84 39.19,119.68 arc90 37.4,121.48 29.56,121.48 arc90 27.76,119.68
PAD24
  Top 0.203: 29.72,97.54 27.18,95 27.18,78.88 25.65,77.36 25.65,74.3 26.14,73.81 IC3.12
  pour Top (isolate 0.305): 27.76,97.87 arc90 29.56,96.08 37.4,96.08 arc90 39.19,97.87 39.19,105.71 arc90 37.4,107.51 29.56,107.51 arc90 27.76,105.71
PAD25
  Top 0.203: IC3.8 28.44,75.94 30.35,77.85 37.97,77.85 43.69,83.57
  pour Top (isolate 0.305): 41.73,83.9 arc90 43.53,82.11 51.37,82.11 arc90 53.16,83.9 53.16,91.74 arc90 51.37,93.54 43.53,93.54 arc90 41.73,91.74
PAD26
  Top 0.203: 43.69,97.54 41.15,95 41.15,82.3 37.34,78.49 30.23,78.49 28.04,76.3 IC3.9
  pour Top (isolate 0.305): 41.73,97.87 arc90 43.53,96.08 51.37,96.08 arc90 53.16,97.87 53.16,105.71 arc90 51.37,107.51 43.53,107.51 arc90 41.73,105.71
PAD27
  Top 0.203: 43.69,111.51 39.88,107.7 39.88,82.3 37.34,79.76 30.86,79.76 27.64,76.54 IC3.10
  pour Top (isolate 0.305): 41.73,111.84 arc90 43.53,110.05 51.37,110.05 arc90 53.16,111.84 53.16,119.68 arc90 51.37,121.48 43.53,121.48 arc90 41.73,119.68
PAD28
  Top 0.203: 69.6,111.51 65.53,107.44 65.53,81.03 75.69,70.87 81.03,70.87 81.49,71.33 IC4.16
  pour Top (isolate 0.305): 67.64,111.84 arc90 69.44,110.05 77.27,110.05 arc90 79.07,111.84 79.07,119.68 arc90 77.27,121.48 69.44,121.48 arc90 67.64,119.68
PAD29
  Top 0.203: 69.6,97.54 66.55,94.49 66.55,81.03 74.97,72.61 IC4.15
  pour Top (isolate 0.305): 67.64,97.87 arc90 69.44,96.08 77.27,96.08 arc90 79.07,97.87 79.07,105.71 arc90 77.27,107.51 69.44,107.51 arc90 67.64,105.71
PAD30
  Top 0.203: 83.57,83.57 83.57,79.9 80.14,76.47 80.14,74.42 80.35,74.21 IC4.11
  pour Top (isolate 0.305): 81.61,83.9 arc90 83.41,82.11 91.24,82.11 arc90 93.04,83.9 93.04,91.74 arc90 91.24,93.54 83.41,93.54 arc90 81.61,91.74
PAD31
  Top 0.203: IC4.14 76.35,73.01 69.6,79.76 69.6,83.57
  pour Top (isolate 0.305): 67.64,83.9 arc90 69.44,82.11 77.27,82.11 arc90 79.07,83.9 79.07,91.74 arc90 77.27,93.54 69.44,93.54 arc90 67.64,91.74
PAD32
  Top 0.203: 83.57,111.51 79.76,107.7 79.76,78.87 78.49,77.6 78.49,74.55 79.63,73.41 IC4.13
  pour Top (isolate 0.305): 81.61,111.84 arc90 83.41,110.05 91.24,110.05 arc90 93.04,111.84 93.04,119.68 arc90 91.24,121.48 83.41,121.48 arc90 81.61,119.68
PAD33
  Top 0.203: 83.57,97.54 81.03,95 81.03,78.88 79.5,77.36 79.5,74.3 79.99,73.81 IC4.12
  pour Top (isolate 0.305): 81.61,97.87 arc90 83.41,96.08 91.24,96.08 arc90 93.04,97.87 93.04,105.71 arc90 91.24,107.51 83.41,107.51 arc90 81.61,105.71
PAD34
  Top 0.203: IC4.8 82.29,75.94 84.2,77.85 91.82,77.85 97.54,83.57
  pour Top (isolate 0.305): 95.58,83.9 arc90 97.38,82.11 105.21,82.11 arc90 107.01,83.9 107.01,91.74 arc90 105.21,93.54 97.38,93.54 arc90 95.58,91.74
PAD35
  Top 0.203: 97.54,97.54 95,95 95,82.3 91.19,78.49 84.07,78.49 81.89,76.3 IC4.9
  pour Top (isolate 0.305): 95.58,97.87 arc90 97.38,96.08 105.21,96.08 arc90 107.01,97.87 107.01,105.71 arc90 105.21,107.51 97.38,107.51 arc90 95.58,105.71
PAD36
  Top 0.203: 97.54,111.51 93.73,107.7 93.73,82.3 91.19,79.76 84.71,79.76 81.49,76.54 IC4.10
  pour Top (isolate 0.305): 95.58,111.84 arc90 97.38,110.05 105.21,110.05 arc90 107.01,111.84 107.01,119.68 arc90 105.21,121.48 97.38,121.48 arc90 95.58,119.68
REXT
  Top 0.203: R1.2 29.34,15.75 28.84,15.25 IC1.7
REXT1
  Top 0.203: R7.2 83.19,15.75 82.69,15.25 IC2.7
REXT2
  Top 0.203: R13.2 29.34,75.95 28.84,75.45 IC3.7
REXT3
  Top 0.203: R19.2 83.19,75.95 82.69,75.45 IC4.7
SCL_H  (via drill 0.51)
  Top 0.203: U1.A5 54.41,58.22 54.41,22.63 49,17.22 45.8,17.22 44.96,16.38 44.96,15.96 R4.1 44.74,15.16 Q2.3 45.76,14.48 v47.5,14.48
  Bottom 0.203: v47.5,14.48 44.96,14.48 39.88,9.4 17.02,9.4 U1.SCL
SCL_H1  (via drill 0.51)
  Top 0.203: U2.A5 108.25,58.22 108.25,22.63 102.84,17.22 99.64,17.22 98.81,16.38 98.81,15.96 R9.1 98.59,15.16 Q4.3 99.61,14.48 v101.35,14.48
  Bottom 0.203: v101.35,14.48 98.81,14.48 93.73,9.4 70.87,9.4 U2.SCL
SCL_H2  (via drill 0.51)
  Top 0.203: U3.A5 54.41,118.42 54.41,82.83 49,77.42 45.8,77.42 44.96,76.58 44.96,76.16 R15.1 44.74,75.36 Q6.3 45.76,74.68 v47.5,74.68
  Bottom 0.203: v47.5,74.68 44.96,74.68 39.88,69.6 17.02,69.6 U3.SCL
SCL_H3  (via drill 0.51)
  Top 0.203: U4.A5 108.25,118.42 108.25,82.83 102.84,77.42 99.64,77.42 98.81,76.58 98.81,76.16 R21.1 98.59,75.36 Q8.3 99.61,74.68 v101.35,74.68
  Bottom 0.203: v101.35,74.68 98.81,74.68 93.73,69.6 70.87,69.6 U4.SCL
SCL_L
  Top 0.203: IC1.2 39.22,12.81 39.45,13.03 45.72,13.03 Q2.2 46.54,10.77 R5.1
SCL_L1
  Top 0.203: IC2.2 93.07,12.81 93.29,13.03 99.57,13.03 Q4.2 100.39,10.77 R11.1
SCL_L2
  Top 0.203: IC3.2 39.22,73.01 39.45,73.23 45.72,73.23 Q6.2 46.54,70.97 R17.1
SCL_L3
  Top 0.203: IC4.2 93.07,73.01 93.29,73.23 99.57,73.23 Q8.2 100.39,70.97 R23.1
SDA_H  (via drill 0.51)
  Top 0.203: U1.A4 57.66,58.9 59.26,57.3 59.26,21.16 52.4,14.3 51.31,14.3 | 50.05,14.3 51.31,14.3 | U1.SDA v20.83,8.13 | 51.31,14.3 v51.31,14.48 51.14,14.31 Q1.3 50.25,15.16 R2.1
  Bottom 0.203: v20.83,8.13 45.14,8.13 51.31,14.3 v51.31,14.48
SDA_H1  (via drill 0.51)
  Top 0.203: U2.A4 111.51,58.9 113.11,57.3 113.11,21.16 106.25,14.3 105.16,14.3 | 103.89,14.3 105.16,14.3 | U2.SDA v74.68,8.13 | 105.16,14.3 v105.16,14.48 104.99,14.31 Q3.3 104.1,15.16 R8.1
  Bottom 0.203: v74.68,8.13 98.98,8.13 105.16,14.3 v105.16,14.48
SDA_H2  (via drill 0.51)
  Top 0.203: U3.A4 57.66,119.1 59.26,117.5 59.26,81.36 52.4,74.5 51.31,74.5 | 50.05,74.5 51.31,74.5 | U3.SDA v20.83,68.33 | 51.31,74.5 v51.31,74.68 51.14,74.51 Q5.3 50.25,75.36 R14.1
  Bottom 0.203: v20.83,68.33 45.14,68.33 51.31,74.5 v51.31,74.68
SDA_H3  (via drill 0.51)
  Top 0.203: U4.A4 111.51,119.1 113.11,117.5 113.11,81.36 106.25,74.5 105.16,74.5 | 103.89,74.5 105.16,74.5 | U4.SDA v74.68,68.33 | 105.16,74.5 v105.16,74.68 104.99,74.51 Q7.3 104.1,75.36 R20.1
  Bottom 0.203: v74.68,68.33 98.98,68.33 105.16,74.5 v105.16,74.68
SDA_L
  Top 0.203: IC1.3 38.61,13.21 38.86,13.46 49.1,13.46 Q1.2 50.35,10.77 R3.1
SDA_L1
  Top 0.203: IC2.3 92.46,13.21 92.71,13.46 102.95,13.46 Q3.2 104.2,10.77 R10.1
SDA_L2
  Top 0.203: IC3.3 38.61,73.41 38.86,73.66 49.1,73.66 Q5.2 50.35,70.97 R16.1
SDA_L3
  Top 0.203: IC4.3 92.46,73.41 92.71,73.66 102.95,73.66 Q7.2 104.2,70.97 R22.1
VREG
  Top 0.203: IC1.5 34.11,14.01 C1.1
VREG1
  Top 0.203: IC2.5 87.96,14.01 C3.1
VREG2
  Top 0.203: IC3.5 34.11,74.21 C5.1
VREG3
  Top 0.203: IC4.5 87.96,74.21 C7.1

## Text on the board
Bottom: v12 | v12 | v12 | v12
Dimension: Route Out | Route Out | Route Out | Route Out | Route Out | Route Out | Route Out | Route Out | Route Out
tPlace: Touch Shield | Touch Shield | 1 | 2 | 3 | 1 | 2 | 3 | 4 | 5 | 6 | 4 | 5 | 6 | 7 | 8 | 9 | 7 | 8 | 9 | ADDR | ADDR | ELE11 | ELE11 | 0 | 1 | 0 | 1 | ELE10 | ELE10 | ELE9 | ELE9 | Touch Shield | Touch Shield | 1 | 2 | 3 | 1 | 2 | 3 | 4 | 5 | 6 | 4 | 5 | 6 | 7 | 8 | 9 | 7 | 8 | 9 | ADDR | ADDR | ELE11 | ELE11 | 0 | 1 | 0 | 1 | ELE10 | ELE10 | ELE9 | ELE9